# EAGLE board SteppyMk2_10x10 (EAGLE 9.2.2)
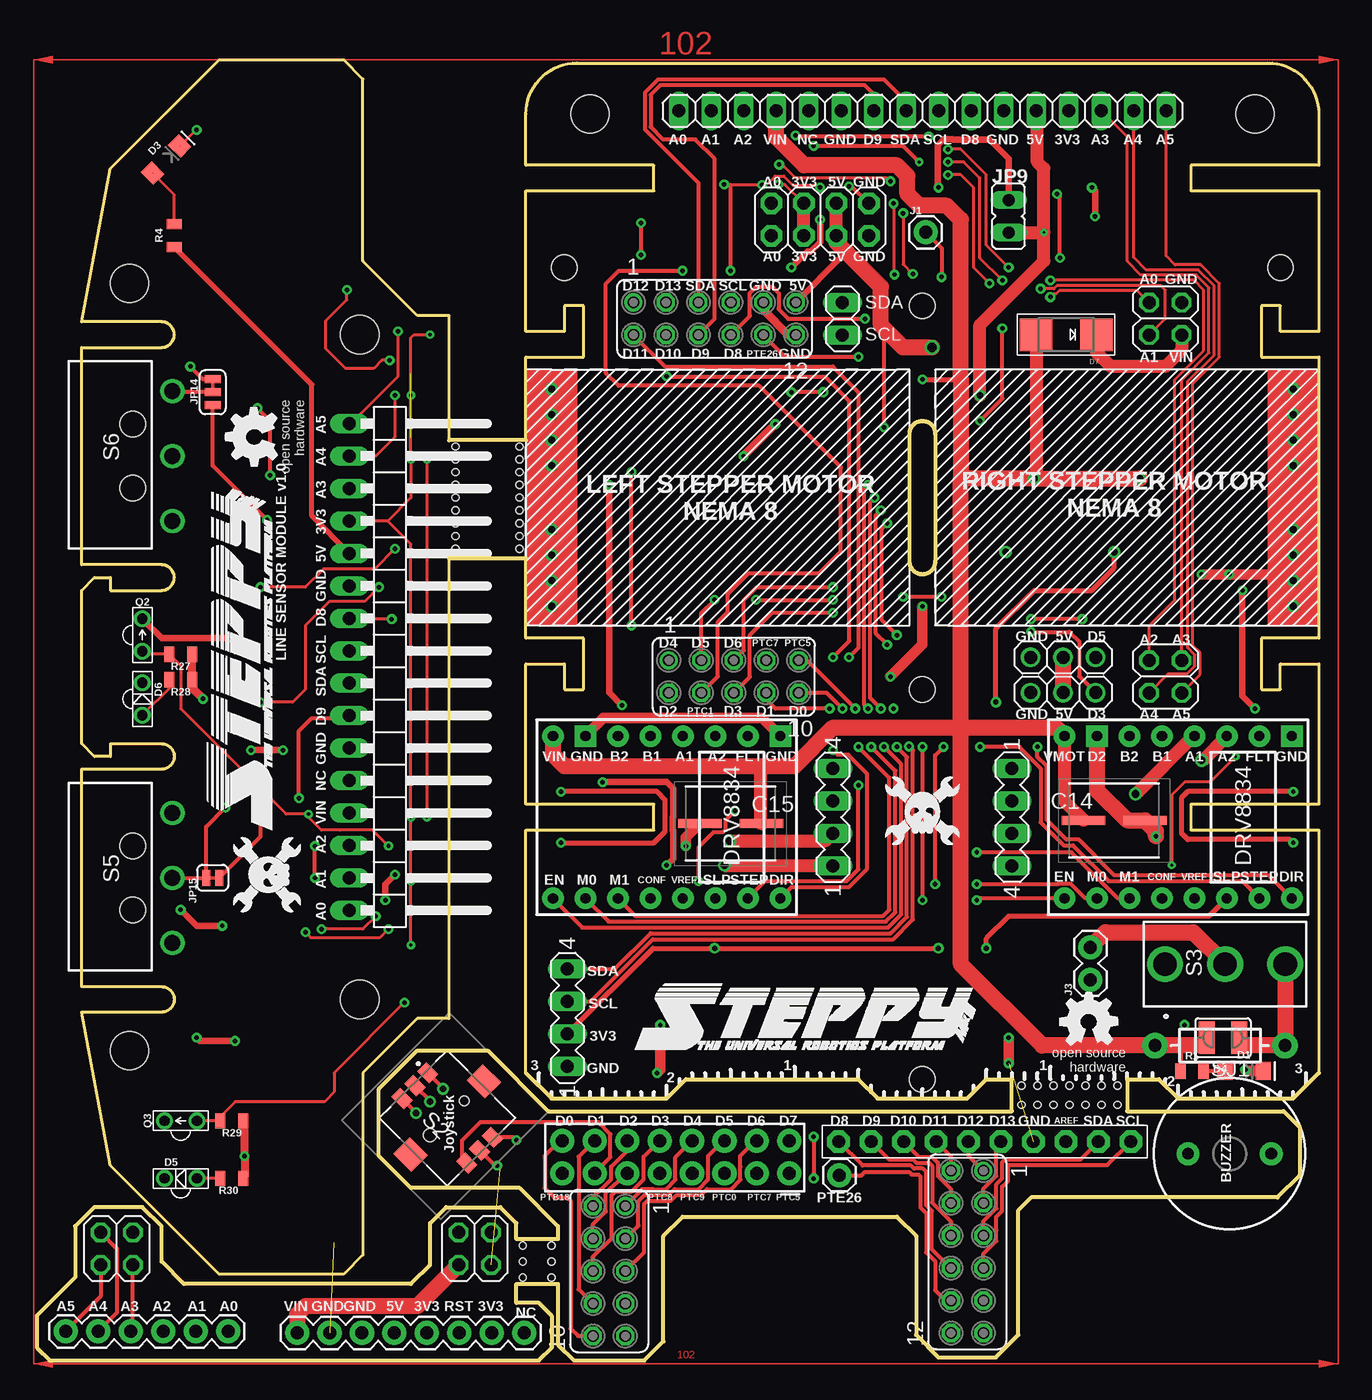
[diagram p0: board, top side]
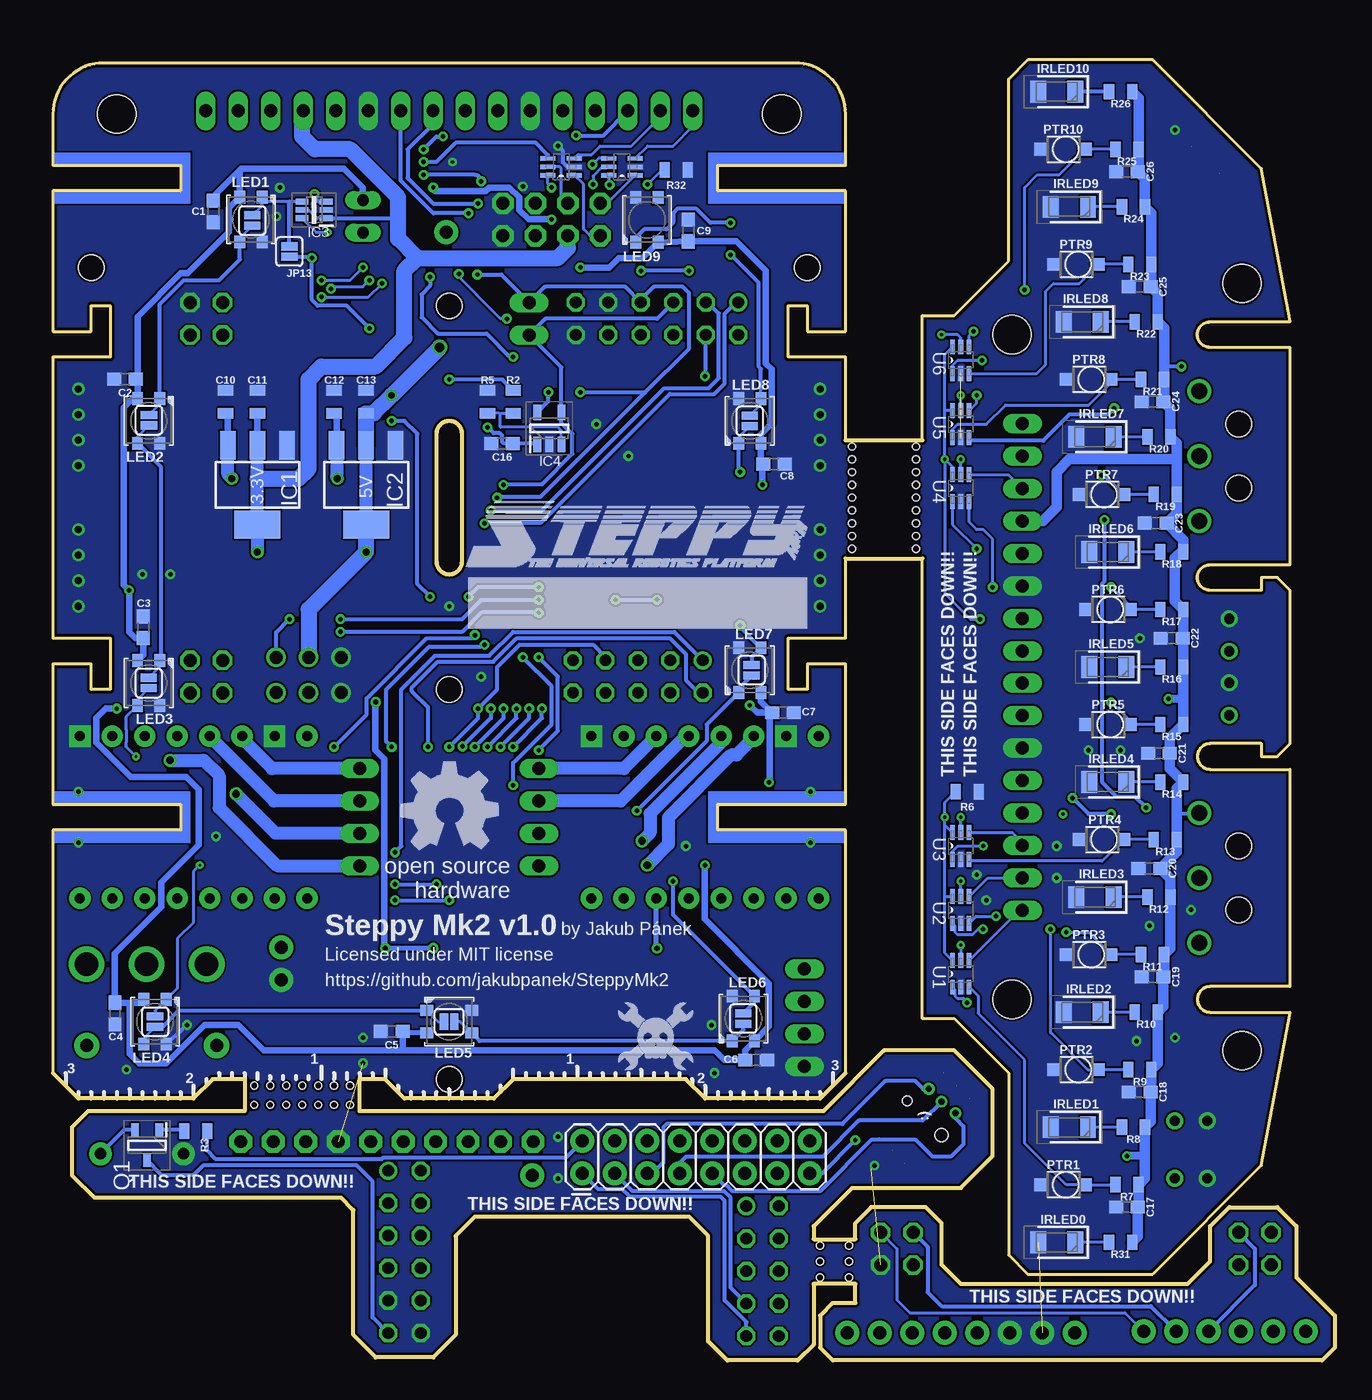
[diagram p1: board, bottom side, seen from below]

Size 100.25 x 101.75 mm. Coordinates in mm from the lower left corner, seen from the top.
Outline: 38.25,97.5 arc-90 42.25,101.5
Outline: 96.25,101.5 arc-90 100.25,97.5
Outline: 38.25,97.5 38.25,93.5 48.25,93.5 48.25,91.5 38.25,91.5 38.25,80.5 41.25,80.5 41.25,82.5 42.75,82.5 42.75,78.5 38.25,78.5 38.25,72 32.25,72 32.25,81.75 29.75,81.75 25.5,86 25.5,100.25 24,101.75 14.25,101.75 5.75,93.25 3.5,81.25 9.75,81.25 arc-90 10.75,80.25 arc-90 9.75,79.25 3.5,79.25 3.5,62.25 9.75,62.25 arc-90 10.75,61.25 arc-90 9.75,60.25 5.75,60.25 5.75,61.25 4.5,61.25 3.5,60.25 3.5,48.25 4.5,47.25 5.75,47.25 5.75,48.25 9.75,48.25 arc-90 10.75,47.25 arc-90 9.75,46.25 3.5,46.25 3.5,29.25 9.75,29.25 arc-90 10.75,28.25 arc-90 9.75,27.25 3.5,27.25 5.75,15.25 14.25,6.75 24,6.75 25.5,8.25 25.5,22.5 29.75,26.75 32.25,26.75 32.25,62.75 38.25,62.75 38.25,56.5 42.75,56.5 42.75,52.5 41.25,52.5 41.25,54.5 38.25,54.5 38.25,43.5 48.25,43.5 48.25,41.5 38.25,41.5 38.25,22.5 40.25,20.5 49.25,20.5 50.75,22 64.25,22 65.75,20.5 72.75,20.5 74.25,22 76.25,22 76.25,19.5 40,19.5 35.26,24.25 29.75,24.25 26.75,21.25 26.75,16 29.25,13.5 37.75,13.5 40.75,10.5 40.75,9.5 37.5,9.5 37.5,10.75 36.25,12 32,12 30.75,10.75 30.75,7.5 29.25,6 11.5,6 9.75,7.75 9.75,10.5 8.25,12 4.5,12 3,10.5 3,6.5 0,3.5 0,1 1,0 39.25,0 40.25,1 40.25,3.5 39.25,4.5 37.5,4.5 37.5,6 40.75,6 40.75,1.25 42,0 47.5,0 49,1.5 49,9.75 50.5,11.25 67.25,11.25 68.75,9.75 68.75,2 70.5,0.25 75,0.25 76.75,2 76.75,11.75 77.75,12.75 97,12.75 98.75,14.5 98.75,18.26 97.5,19.5 85.25,19.5 85.25,22 87.75,22 89.25,20.5 98.25,20.5 100.25,22.5 100.25,41.5 90.25,41.5 90.25,43.5 100.25,43.5 100.25,54.5 97.25,54.5 97.25,52.5 95.75,52.5 95.75,56.5 100.25,56.5 100.25,78.5 95.75,78.5 95.75,82.5 97.25,82.5 97.25,80.5 100.25,80.5 100.25,91.5 90.25,91.5 90.25,93.5 100.25,93.5 100.25,97.5
Outline: 38.25,97.5 arc-90 42.25,101.5
Outline: 42.25,101.5 96.25,101.5
Outline: 96.25,101.5 arc-90 100.25,97.5
Outline: 68.25,62.5 68.25,72.5 arc-90 69.25,73.5 arc-90 70.25,72.5 70.25,62.5 arc-90 69.25,61.5 arc-90 68.25,62.5
Copper layers (1*16): Top 0.035mm / dielectric 1.5mm / Bottom 0.035mm
Design rules "default *": minimum track width 6mil, minimum drill 0.2mm, track to track 6mil, track to pad 6mil, pad to pad 6mil, via to via 6mil, smd to smd 6mil, copper to edge 0.2mm, drill to drill 6mil, minimum pad ring 10mil, minimum via ring 8mil, stop-mask expansion 4mil, vias tented up to drill 0mil, thermal gap 10mil
Holes 2 mm at 41.25,85.5 69.25,52.5 69.25,82.5 7.5,68.25 7.5,73.25 7.5,35.25 7.5,40.25 69.25,22 97.25,85.5
Holes 3 mm at 95.25,97.5 43.25,97.5 25.25,28.25 25.25,80.25 7.25,24.25 7.25,84.25
Holes 0.55 mm at 32.75,69.5 32.75,68.5 32.75,67.5 32.75,66.5 32.75,65.5 37.75,65.5 37.75,66.5 37.75,67.5 37.75,68.5 37.75,69.5 38,6.5 38,9 38,7.75 40.25,9 40.25,6.5 40.25,7.75 77,20 78.25,20 79.5,20 80.75,20 82,20 82,21.5 77,21.5 78.25,21.5 80.75,21.5 79.5,21.5 83.25,20 84.5,20 83.25,21.5 84.5,21.5 37.75,64.5 37.75,63.5 32.75,63.5 32.75,64.5 32.75,70.5 32.75,71.5 37.75,71.5 37.75,70.5

## Footprints (pad centres in the part's own frame; a part is rotated, then mirrored left to right if it is on the bottom)
0603 = smd 1.1 x 1: 1 -0.85,0; 2 0.85,0
0805 = smd 0.8 x 1.2: 1 -0.9,0; 2 0.9,0
CAPM7058X610N = smd 3.4 x 0.7: 1 -2.4,0; 2 2.4,0
POLOLU-DRV8825 = drill 0.8 pad 1.676: A1 6.35,-1.27; A2 6.35,-3.81; B1 6.35,1.27; B2 6.35,3.81; CONFIG -6.35,1.27; DIR -6.35,-8.89; EN -6.35,8.89; FLT 6.35,-6.35; M0 -6.35,6.35; M1 -6.35,3.81; SLP -6.35,-3.81; STEP -6.35,-6.35; VMOT 6.35,8.89; VREF -6.35,-1.27 | drill 0.8 pad 1.676 square: GND0 6.35,6.35; GND1 6.35,-8.89
LED-1206 = smd 1.2 x 1.4: A -1.5,0; C 1.5,0
DIODE-1N4001 = drill 1 pad 1.981: A -5.08,0; C 5.08,0
LTE-302 = drill 0.8: A 1.27,0; C -1.27,0
SMADIODE = smd 2.54 x 2.54: A 2.349,0; C -2.349,0
SOT223 = smd 1.219 x 2.235: 1 -2.311,-3.099; 2 0,-3.099; 3 2.311,-3.099 | smd 3.6 x 2.2: TAB 0,3.099
SOT65P210X110-6N = smd 1 x 0.45: 1 -0.95,0.65; 2 -0.95,0; 3 -0.95,-0.65; 4 0.95,-0.65; 5 0.95,0; 6 0.95,0.65
SOT95P280X145-5N = smd 1.2 x 0.6: 1 -1.25,0.95; 2 -1.25,0; 3 -1.25,-0.95; 4 1.25,-0.95; 5 1.25,0.95
LEDC3215X130N = smd 1.25 x 1.7: 1 -1.45,0; 2 1.45,0
1X01 = drill 1.016 pad 1.88: 1 0,0
1X02 = drill 1.016 pad 1.88: 1 0,0; 2 2.54,0
1X08 = drill 1.016 pad 1.88: 1 0,0; 2 2.54,0; 3 5.08,0; 4 7.62,0; 5 10.16,0; 6 12.7,0; 7 15.24,0; 8 17.78,0
1X06 = drill 1.016 pad 1.88: 1 0,0; 2 2.54,0; 3 5.08,0; 4 7.62,0; 5 10.16,0; 6 12.7,0
2X8 = drill 1.016 pad 1.88: 1 0,0; 2 0,2.54; 3 2.54,0; 4 2.54,2.54; 5 5.08,0; 6 5.08,2.54; 7 7.62,0; 8 7.62,2.54; 9 10.16,0; 10 10.16,2.54; 11 12.7,0; 12 12.7,2.54; 13 15.24,0; 14 15.24,2.54; 15 17.78,0; 16 17.78,2.54
SMT-JUMPER_2_NC_PASTE_SILK = smd 0.635 x 1.27: 1 -0.406,0; 2 0.406,0
JP1 = drill 0.914 long: 1 0,-1.27; 2 0,1.27
1X16/90 = drill 1.016 long: 1 -19.05,-3.81; 2 -16.51,-3.81; 3 -13.97,-3.81; 4 -11.43,-3.81; 5 -8.89,-3.81; 6 -6.35,-3.81; 7 -3.81,-3.81; 8 -1.27,-3.81; 9 1.27,-3.81; 10 3.81,-3.81; 11 6.35,-3.81; 12 8.89,-3.81; 13 11.43,-3.81; 14 13.97,-3.81; 15 16.51,-3.81; 16 19.05,-3.81
1X16 = drill 1.016 long: 1 -19.05,0; 2 -16.51,0; 3 -13.97,0; 4 -11.43,0; 5 -8.89,0; 6 -6.35,0; 7 -3.81,0; 8 -1.27,0; 9 1.27,0; 10 3.81,0; 11 6.35,0; 12 8.89,0; 13 11.43,0; 14 13.97,0; 15 16.51,0; 16 19.05,0
2X04 = drill 1.016 pad 1.676 octagon: 1 -3.81,-1.27; 2 -3.81,1.27; 3 -1.27,-1.27; 4 -1.27,1.27; 5 1.27,-1.27; 6 1.27,1.27; 7 3.81,-1.27; 8 3.81,1.27
SMT-JUMPER_3_1-NC_TRACE_SILK = smd 0.635 x 1.27: 1 -1.016,0; 2 0,0; 3 1.016,0
SMT-JUMPER_2_NC_TRACE_SILK = smd 0.635 x 1.27: 1 -0.508,0; 2 0.508,0
2X02 = drill 1.016 octagon: 1 -1.27,-1.27; 2 -1.27,1.27; 3 1.27,-1.27; 4 1.27,1.27
1X03 = drill 1.016: 1 -2.54,0; 2 0,0; 3 2.54,0
1X02' = drill 1.016 long: 1 -1.27,0; 2 1.27,0
LED3535 = smd 1 x 0.85: 1 -1.75,0.875; 2 -1.75,-0.875; 3 1.75,-0.875; 4 1.75,0.875
BUZZER-12MM = drill 0.9 pad 1.778: + 3.25,0; - -3.25,0
TEMT1020 = smd 1.1 x 1: 1 -1.7,0; 2 1.7,0
SOT96P237X111-3N = smd 1 x 0.6: 1 -1.2,0.955; 2 -1.2,-0.955; 3 1.2,0
LTR-301 = drill 0.8: C 1.27,0; E -1.27,0
SKRHABE010 = smd 1.35 x 1: 1 -3.575,1.425; 2 -3.575,0; 3 -3.575,-1.425; 4 3.575,1.425; 5 3.575,0; 6 3.575,-1.425 | smd 2 x 1.8: 7 0,4.05; 8 0,-4.05 | hole 0.75: 0,1.9 | hole 1.05: 0,-1.9
5MS1S102AM2QES = drill 1.85 pad 2.8: 1 0,-4.7; 2 0,0; 3 0,4.7
AH186061A = drill 1.25 pad 1.9: 1 -5.08,1.6; 2 0,1.6; 3 5.08,1.6
SJW = smd 1.27 x 2.54: 1 -1.27,0; 2 1.27,0
MA04-1 = drill 1.016 long: 1 -3.81,0; 2 -1.27,0; 3 1.27,0; 4 3.81,0
FE05-2 = drill 0.914: 1 -5.08,1.27 | drill 0.914 octagon: 2 -5.08,-1.27; 3 -2.54,1.27; 4 -2.54,-1.27; 5 0,1.27; 6 0,-1.27; 7 2.54,1.27; 8 2.54,-1.27; 9 5.08,1.27; 10 5.08,-1.27
FE06-2 = drill 0.914: 1 -6.35,1.27 | drill 0.914 octagon: 2 -6.35,-1.27; 3 -3.81,1.27; 4 -3.81,-1.27; 5 -1.27,1.27; 6 -1.27,-1.27; 7 1.27,1.27; 8 1.27,-1.27; 9 3.81,1.27; 10 3.81,-1.27; 11 6.35,1.27; 12 6.35,-1.27
SOT65P210X110-6N' = smd 1.168 x 0.356: 1 -1.041,0.66; 2 -1.041,0; 3 -1.041,-0.66; 4 1.041,-0.66; 5 1.041,0; 6 1.041,0.66
1X10-BIG = drill 1.016 pad 1.778 octagon: 1 -11.43,0; 2 -8.89,0; 3 -6.35,0; 4 -3.81,0; 5 -1.27,0; 6 1.27,0; 7 3.81,0; 8 6.35,0; 9 8.89,0; 10 11.43,0

## Placement (x,y rotation side)
C1  0.1uF  [0603]  87.71,89.89 270 bottom
C2  0.1uF  [0603]  94.61,76.77 180 bottom
C3  0.1uF  [0603]  93.17,57.36 90 bottom
C4  0.1uF  [0603]  95.39,27.14 270 bottom
C5  0.1uF  [0603]  73.75,25.75 180 bottom
C6  0.1uF  [0603]  45.25,23.5 0 bottom
C7  0.1uF  [0603]  43.14,50.68 0 bottom
C8  0.1uF  [0603]  43.86,70.13 0 bottom
C9  0.1uF  [0603]  50.56,88.39 90 bottom
C10  10uF  [0805]  86.75,75 90 bottom
C11  10uF  [0805]  84.25,75 90 bottom
C12  10uF  [0805]  78.25,75 90 bottom
C13  10uF  [0805]  75.75,75 90 bottom
C14  100UF  [CAPM7058X610N]  84.25,42.25 180 top
C15  100UF  [CAPM7058X610N]  54.25,42 0 top
C16  0.1uF  [0603]  65.13,71.73 180 bottom
C17  0.1uF  [0603]  16.25,12 0 bottom
C18  0.1uF  [0603]  15.25,21 0 bottom
C19  0.1uF  [0603]  14.25,30 0 bottom
C20  0.1uF  [0603]  14.5,38.5 0 bottom
C21  0.1uF  [0603]  13.75,47.5 0 bottom
C22  0.1uF  [0603]  12.75,56.5 0 bottom
C23  0.1uF  [0603]  14,65.5 0 bottom
C24  0.1uF  [0603]  14.25,75 0 bottom
C25  0.1uF  [0603]  15.25,84 0 bottom
C26  0.1uF  [0603]  16.25,93 0 bottom
CONLEFT  POLOLU-DRV8825  [POLOLU-DRV8825]  89.25,42.5 90 top
D1  GREEN  [LED-1206]  94.4,22.65 0 top
D3  GREEN  [LED-1206]  10.11,93.95 45 top
D4  P2000A  [DIODE-1N4001]  92.52,24.64 180 top
D5  [LTE-302]  11.25,14.25 0 top
D6  [LTE-302]  8.25,51.75 270 top
D7  [SMADIODE]  80.5,80.25 180 top
GOLD_ORB_SM1  OSHWLOGOLOGO8MM  [OSHW_8MM]  69.25,43 0 bottom
GOLD_ORB_SM2  OSHWLOGOLOGO5MM  [OSHW_5MM]  82.25,26.5 0 top
GOLD_ORB_SM3  OSHWLOGOLOGO5MM  [OSHW_5MM]  17,72.25 90 top
IC1  AP1117E33G-13  [SOT223]  84.25,68.5 180 bottom
IC2  TS1117BCW-5.0  [SOT223]  75.75,68.5 180 bottom
IC3  74LVC1T45GW,125  [SOT65P210X110-6N]  79.82,90.01 180 bottom
IC4  MCP3021A0T-E_OT  [SOT95P280X145-5N]  61.42,72.92 90 bottom
IRLED0  LL-S150IRC-2A  [LEDC3215X130N]  21.75,9.25 180 bottom
IRLED1  LL-S150IRC-2A  [LEDC3215X130N]  20.75,18.25 180 bottom
IRLED2  LL-S150IRC-2A  [LEDC3215X130N]  19.75,27.25 180 bottom
IRLED3  LL-S150IRC-2A  [LEDC3215X130N]  18.75,36.25 180 bottom
IRLED4  LL-S150IRC-2A  [LEDC3215X130N]  17.75,45.25 180 bottom
IRLED5  LL-S150IRC-2A  [LEDC3215X130N]  17.75,54.25 180 bottom
IRLED6  LL-S150IRC-2A  [LEDC3215X130N]  17.75,63.25 180 bottom
IRLED7  LL-S150IRC-2A  [LEDC3215X130N]  18.75,72.25 180 bottom
IRLED8  LL-S150IRC-2A  [LEDC3215X130N]  19.75,81.25 180 bottom
IRLED9  LL-S150IRC-2A  [LEDC3215X130N]  20.75,90.25 180 bottom
IRLED10  LL-S150IRC-2A  [LEDC3215X130N]  21.75,99.25 180 bottom
J1  [1X01]  69.5,88.25 0 top
J3  [1X02]  82.38,29.79 90 top
J5  [1X08]  38.13,2.16 180 top
J6  [1X06]  14.96,2.28 180 top
J7  [1X01]  62.75,14.5 270 top
J8  [2X8]  58.85,14.65 0 bottom
JP1  JUMPER-SMT_2_NC_PASTE_SILK  [SMT-JUMPER_2_NC_PASTE_SILK]  84.65,89.18 270 bottom
JP2  JUMPER-SMT_2_NC_PASTE_SILK  [SMT-JUMPER_2_NC_PASTE_SILK]  92.73,73.56 270 bottom
JP3  JUMPER-SMT_2_NC_PASTE_SILK  [SMT-JUMPER_2_NC_PASTE_SILK]  92.75,53 270 bottom
JP4  JUMPER-SMT_2_NC_PASTE_SILK  [SMT-JUMPER_2_NC_PASTE_SILK]  92.25,26.5 270 bottom
JP5  JUMPER-SMT_2_NC_PASTE_SILK  [SMT-JUMPER_2_NC_PASTE_SILK]  69.25,26.5 0 bottom
JP6  JUMPER-SMT_2_NC_PASTE_SILK  [SMT-JUMPER_2_NC_PASTE_SILK]  46.25,26.75 90 bottom
JP7  JUMPER-SMT_2_NC_PASTE_SILK  [SMT-JUMPER_2_NC_PASTE_SILK]  45.61,54 90 bottom
JP8  JUMPER-SMT_2_NC_PASTE_SILK  [SMT-JUMPER_2_NC_PASTE_SILK]  45.75,73.5 90 bottom
JP9  [JP1]  76,89.5 180 top
JP10  [1X16/90]  28.25,54.25 270 top
JP11  [1X16]  69.25,97.75 0 top
JP12  [2X04]  61.25,89.25 0 top
JP13  JUMPER-SMT_2_NC_PASTE_SILK  [SMT-JUMPER_2_NC_PASTE_SILK]  81.75,86.75 90 bottom
JP14  JUMPER-SMT_3_1-NC_TRACE_SILK  [SMT-JUMPER_3_1-NC_TRACE_SILK]  13.75,75.75 90 top
JP15  JUMPER-SMT_2_NC_TRACE_SILK  [SMT-JUMPER_2_NC_TRACE_SILK]  13.75,37.75 180 top
JP21  [2X02]  34.25,8.75 180 top
JP22  [2X02]  6.25,8.75 180 top
JP23  [2X02]  88.25,81.5 270 top
JP24  [1X03]  80.25,55 0 top
JP25  [1X03]  80.25,52.25 0 top
JP26  [2X02]  88.25,53.5 270 top
JP27  [1X02']  63,81.5 90 top
LED1  WS2812B3535  [LED3535]  84.75,89.25 270 bottom
LED2  WS2812B3535  [LED3535]  92.75,73.5 270 bottom
LED3  WS2812B3535  [LED3535]  92.75,53 270 bottom
LED4  WS2812B3535  [LED3535]  92.25,26.5 270 bottom
LED5  WS2812B3535  [LED3535]  69.25,26.5 0 bottom
LED6  WS2812B3535  [LED3535]  46.25,26.75 90 bottom
LED7  WS2812B3535  [LED3535]  45.75,54 90 bottom
LED8  WS2812B3535  [LED3535]  45.75,73.5 90 bottom
LED9  WS2812B3535  [LED3535]  53.79,89.23 90 bottom
LS1  BUZZER-PTH  [BUZZER-12MM]  93.28,16.17 0 top
PTR1  TEMT1020  [TEMT1020]  21.25,13.75 180 bottom
PTR2  TEMT1020  [TEMT1020]  20.25,22.75 180 bottom
PTR3  TEMT1020  [TEMT1020]  19.25,31.75 180 bottom
PTR4  TEMT1020  [TEMT1020]  18.25,40.75 180 bottom
PTR5  TEMT1020  [TEMT1020]  17.75,49.75 180 bottom
PTR6  TEMT1020  [TEMT1020]  17.75,58.75 180 bottom
PTR7  TEMT1020  [TEMT1020]  18.25,67.75 180 bottom
PTR8  TEMT1020  [TEMT1020]  19.25,76.75 180 bottom
PTR9  TEMT1020  [TEMT1020]  20.25,85.75 180 bottom
PTR10  TEMT1020  [TEMT1020]  21.25,94.75 180 bottom
Q1  SBC817-40LT1G  [SOT96P237X111-3N]  92.88,16.85 270 bottom
Q2  [LTR-301]  8.25,56.75 270 top
Q3  [LTR-301]  11.25,18.75 0 top
R1  1K  [0805]  90.34,22.64 0 top
R2  10K  [0805]  64.25,75 270 bottom
R3  4.7K  [0805]  89.08,17.94 0 bottom
R4  330  [0805]  10.75,88 90 top
R5  10K  [0805]  66.25,75 90 bottom
R6  330K  [0805]  28.75,44.5 180 bottom
R7  10K  [0805]  16.25,13.75 180 bottom
R8  330  [0805]  15.75,18.25 180 bottom
R9  10K  [0805]  15.25,22.75 180 bottom
R10  330  [0805]  14.75,27.25 180 bottom
R11  10K  [0805]  14.25,31.75 180 bottom
R12  330  [0805]  13.75,36.25 180 bottom
R13  10K  [0805]  13.25,40.75 180 bottom
R14  330  [0805]  12.75,45.25 180 bottom
R15  10K  [0805]  12.75,49.75 180 bottom
R16  330  [0805]  12.75,54.25 180 bottom
R17  10K  [0805]  12.75,58.75 180 bottom
R18  330  [0805]  12.75,63.25 180 bottom
R19  10K  [0805]  13.25,67.75 180 bottom
R20  330  [0805]  13.75,72.25 180 bottom
R21  10K  [0805]  14.25,76.75 180 bottom
R22  330  [0805]  14.75,81.25 180 bottom
R23  10K  [0805]  15.25,85.75 180 bottom
R24  330  [0805]  15.75,90.25 180 bottom
R25  10K  [0805]  16.25,94.75 180 bottom
R26  330  [0805]  16.75,99.25 180 bottom
R27  10K  [0805]  11.25,55.25 180 top
R28  330  [0805]  11.25,53.25 180 top
R29  10K  [0805]  15.25,18.75 180 top
R30  330  [0805]  15.25,14.25 180 top
R31  330  [0805]  16.75,9.25 180 bottom
R32  330K  [0805]  51.5,93.12 180 bottom
S2  SKRHABE010  [SKRHABE010]  32.09,18.97 315 top
S3  5MS1S102AM2QES  [5MS1S102AM2QES]  92.92,31.01 270 top
S5  AH186061A  [AH186061A]  9,37.75 270 top
S6  AH186061A  [AH186061A]  9,70.75 270 top
SJ1  [SJW]  92.75,25.25 180 top
SV1  [MA04-1]  62.25,42.5 90 top
SV2  [MA04-1]  76.25,42.5 270 top
SV3  [MA04-1]  41.48,26.81 90 top
SV4  [FE05-2]  44.75,7 270 top
SV5  [FE06-2]  72.75,8.5 270 top
SV6  [FE05-2]  54.5,53.5 0 top
SV7  [FE06-2]  53,81.5 0 top
U1  NC7SB3157P6X  [SOT65P210X110-6N']  29.25,30.25 90 bottom
U2  NC7SB3157P6X  [SOT65P210X110-6N']  29.25,35.25 90 bottom
U3  NC7SB3157P6X  [SOT65P210X110-6N']  29.25,40.25 90 bottom
U4  NC7SB3157P6X  [SOT65P210X110-6N']  29.25,68.25 90 bottom
U5  NC7SB3157P6X  [SOT65P210X110-6N']  29.25,73.25 90 bottom
U6  NC7SB3157P6X  [SOT65P210X110-6N']  29.25,78.25 90 bottom
U7  NC7SB3157P6X  [SOT65P210X110-6N']  55.75,93.38 180 bottom
U8  NC7SB3157P6X  [SOT65P210X110-6N']  60.5,93.38 180 bottom
U$1  PINHD-1X10  [1X10-BIG]  74.12,17.12 0 top
U$2  POLOLU-DRV8825  [POLOLU-DRV8825]  49.25,42.5 90 top

## Library data of the parts
C1-C9 C16-C26 = SparkFun-Capacitors; PROD_ID: CAP-08604
C10-C13 = SparkFun-Capacitors; PROD_ID: CAP-11330
C14 C15 = EEEFK1C101P; ALLIED_NUMBER: 70256494; ALLIED_PRICE-STOCK: https://www.alliedelec.com/panasonic-eee-fk1c101p/70256494/; DESCRIPTION: Ecap 100uF 16V D case Panasonic 100uF 16 V dc Aluminium Electrolytic Capacitor, FK SMD Series 2000h 6.3 Dia. x 5.8mm; HEIGHT: 6.1mm; MANUFACTURER_NAME: Panasonic; MANUFACTURER_PART_NUMBER: EEEFK1C101P; RS_PART_NUMBER: 5370433P; RS_PRICE-STOCK: http://uk.rs-online.com/web/p/products/5370433P
CONLEFT U$2 = alvarop-lib
D1 D3 = SparkFun-LED; PROD_ID: DIO-00862
D4 = SparkFun-DiscreteSemi; PROD_ID: DIO-09176
D5 D6 = SparkFun-LED; PROD_ID: DIO-14163; SF_ID: SEN-00241
D7 JP12 JP24 JP25 LED1-LED9 U$1 = adafruit
GOLD_ORB_SM1-GOLD_ORB_SM3 = oshw
IC1 IC2 = lm1117
IC3 = 74LVC1T45GW_125; DESCRIPTION: NXP - 74LVC1T45GW,125 - TRANSCEIVER, 3 STATE, SOT-363-6; HEIGHT: 1.1mm; MANUFACTURER_NAME: Nexperia; MANUFACTURER_PART_NUMBER: 74LVC1T45GW,125; MOUSER_PART_NUMBER: 771-74LVC1T45GW125; MOUSER_PRICE-STOCK: https://www.mouser.com/Search/Refine.aspx?Keyword=771-74LVC1T45GW125; RS_PART_NUMBER: 8168791P; RS_PRICE-STOCK: http://befr.rs-online.com/web/p/products/8168791P
IC4 = MCP3021A0T-E_OT; ALLIED_NUMBER: 70451980; ALLIED_PRICE-STOCK: https://www.alliedelec.com/microchip-technology-inc-mcp3021a0t-e-ot/70451980/; DESCRIPTION: MICROCHIP - MCP3021A0T-E/OT - ADC, AEC-Q100, SAR, 10BIT, SOT-23-5; HEIGHT: 1.45mm; MANUFACTURER_NAME: Microchip; MANUFACTURER_PART_NUMBER: MCP3021A0T-E/OT; MOUSER_PART_NUMBER: 579-MCP3021A0T-E/OT; MOUSER_PRICE-STOCK: https://www.mouser.com/Search/Refine.aspx?Keyword=579-MCP3021A0T-E%2FOT
IRLED0 IRLED1-IRLED10 = PT15-21C_TR8; DESCRIPTION: Phototransistors IR Phototransistor; HEIGHT: 1.3mm; MANUFACTURER_NAME: Everlight; MANUFACTURER_PART_NUMBER: PT15-21C/TR8; MOUSER_PART_NUMBER: 638-PT1521CTR8; MOUSER_PRICE-STOCK: https://www.mouser.com/Search/Refine.aspx?Keyword=638-PT1521CTR8
J1 J3 J7 J8 = SparkFun-Connectors
J5 = SparkFun-Connectors; PROD_ID: CONN-08438
J6 = SparkFun-Connectors; PROD_ID: CONN-08437
JP1-JP8 JP13-JP15 = SparkFun-Jumpers
JP9 SJ1 = jumper
JP10 JP11 JP21-JP23 JP26 JP27 = pinhead
LS1 = SparkFun-Electromechanical; PROD_ID: COMP-08253; SF_SKU: COM-07950
PTR1-PTR10 = TEMD1020; DESCRIPTION: VISHAY - TEMD1020 - PHOTODIODE, 940NM, 15DEG, SMD; HEIGHT: mm; MANUFACTURER_NAME: Vishay; MANUFACTURER_PART_NUMBER: TEMD1020; MOUSER_PART_NUMBER: 782-TEMD1020; MOUSER_PRICE-STOCK: https://www.mouser.com/Search/Refine.aspx?Keyword=782-TEMD1020; RS_PART_NUMBER: 1808105P; RS_PRICE-STOCK: http://uk.rs-online.com/web/p/products/1808105P
Q1 = SBC817-40LT1G; ALLIED_NUMBER: 70300549; ALLIED_PRICE-STOCK: http://www.alliedelec.com/on-semiconductor-sbc817-40lt1g/70300549/; DESCRIPTION: NPN Bipolar Transistor, 500 mA 45 V, 3-pin SOT-23; HEIGHT: 1.11mm; MANUFACTURER_NAME: ON Semiconductor; MANUFACTURER_PART_NUMBER: SBC817-40LT1G; MOUSER_PART_NUMBER: 863-SBC817-40LT1G; MOUSER_PRICE-STOCK: https://www.mouser.com/Search/Refine.aspx?Keyword=863-SBC817-40LT1G; RS_PART_NUMBER: 1631159; RS_PRICE-STOCK: http://uk.rs-online.com/web/p/products/1631159
Q2 Q3 = SparkFun-Sensors; PROD_ID: DIO-10904; SF_ID: SEN-00241
R1-R32 = SparkFun-Resistors
S2 = SKRHABE010; DESCRIPTION: Multi-Directional Switches 4-directn cntr push W/boss 200K Cycles; HEIGHT: 5mm; MANUFACTURER_NAME: ALPS; MANUFACTURER_PART_NUMBER: SKRHABE010; MOUSER_PART_NUMBER: 688-SKRHAB; MOUSER_PRICE-STOCK: https://www.mouser.com/Search/Refine.aspx?Keyword=688-SKRHAB
S3 = 5MS1S102AM2QES; DESCRIPTION: Slide switch,SP,5.08 high PC thru-hole PCB Slide Switch SPDT On-On 5 A@ 28 V dc Top; HEIGHT: mm; MANUFACTURER_NAME: RS Components; MANUFACTURER_PART_NUMBER: 5MS1S102AM2QES; RS_PART_NUMBER: 7347292; RS_PRICE-STOCK: http://uk.rs-online.com/web/p/products/7347292
S5 S6 = AH186061A; DESCRIPTION: Ultra-miniature Size Switch; HEIGHT: mm; MANUFACTURER_NAME: Panasonic; MANUFACTURER_PART_NUMBER: AH186061A
SV1-SV3 = con-lstb; OC_FARNELL: unknown; OC_NEWARK: unknown
SV4-SV7 = con-lsta; OC_FARNELL: unknown; OC_NEWARK: unknown
U1-U8 = NC7SB3157P6X; AVAILABILITY: Unavailable; DESCRIPTION: NC7SB3157 Series 1.65 to 5.5 V Multiplexer/Demultiplexer Bus Switch - SC-70-6; MF: ON Semiconductor; MP: NC7SB3157P6X; PACKAGE: SC-70-6 ON Semiconductor; PRICE: None

## Nets
3V3REG: C11.1 CONLEFT.SLP IC1.2 IC1.TAB IC3.1 IC3.5 JP11.13 JP12.3 JP12.4 SV3.2 U7.5 U8.5 U$2.SLP
3V3REG_: C17.2 C18.2 C19.2 C20.2 C21.2 C22.2 C23.2 C24.2 C25.2 C26.2 JP10.4 JP14.3 R7.1 R8.1 R9.1 R10.1 R11.1 R12.1 R13.1 R14.1 R15.1 R16.1 R17.1 R18.1 R19.1 R20.1 R21.1 R22.1 R23.1 R24.1 R25.1 R26.1 R27.1 R28.1 R29.1 R30.1 R31.1 S5.1 U1.5 U2.5 U3.5 U4.5 U5.5 U6.5
5VREG: C13.1 C16.1 IC2.2 IC2.TAB IC3.6 IC4.1 JP9.2 JP11.12 JP12.5 JP12.6 JP24.2 JP25.2 SV7.11
5VREG*: Q1.3 SV5.11
5VREG_: JP10.5 R4.1
A0: JP23.1 U7.4
A0*: J6.1 JP21.1
A0A: PTR1.1 R7.2 U1.3
A0B: Q3.C R29.2 U1.1
A0C: JP11.1 U7.3
A0D: JP12.2 U7.1
A0S: JP10.16 U1.4
A1: JP23.3 U8.4
A1*: J6.2 JP21.3
A1A: PTR2.1 R9.2 U2.3
A1B: PTR3.1 R11.2 U2.1
A1C: JP11.2 U8.3
A1D: JP12.1 U8.1
A1S: JP10.15 U2.4
A2: JP11.3 JP26.1
A2*: J6.3 JP22.1
A2A: PTR4.1 R13.2 U3.3
A2B: Q2.C R27.2 U3.1
A2S: JP10.14 U3.4
A3: JP11.14 JP26.2
A3*: J6.4 JP22.2
A3A: PTR5.1 R15.2 U4.3
A3B: PTR6.1 R17.2 U4.1
A3S: JP10.3 U4.4
A4: JP11.15 JP26.3
A4*: J6.5 JP22.3
A4A: PTR7.1 R19.2 U5.3
A4B: PTR8.1 R21.2 U5.1
A4S: JP10.2 U5.4
A5: JP11.16 JP26.4
A5*: J6.6 JP22.4
A5A: PTR9.1 R23.2 U6.3
A5B: PTR10.1 R25.2 U6.1
A5S: JP10.1 U6.4
D0: SV6.10 U$2.M0
D0*: J8.16 SV4.10
D1: SV6.8 U$2.M1
D1*: J8.14 SV4.8
D2: CONLEFT.M0 SV6.2
D2*: J8.12 SV4.2
D3: JP25.3 SV6.6
D3*: J8.10 SV4.6
D4: CONLEFT.M1 SV6.1
D4*: J8.8 SV4.1
D5: JP24.3 SV6.3
D5*: J8.6 SV4.3
D6: IC3.3 JP13.1 SV6.5
D6*: J8.4 SV4.5
D7*: J8.2 R3.2
D8: JP11.10 SV7.8
D8*: SV5.8 U$1.1
D8_: JP10.7 R6.2 U1.6 U2.6 U3.6 U4.6 U5.6 U6.6
D9: JP11.7 SV7.6
D9*: SV5.6 U$1.2
D9_: JP10.10 JP15.1
D10: SV7.4 U$2.DIR
D10*: SV5.4 U$1.3
D11: SV7.2 U$2.STEP
D11*: SV5.2 U$1.4
D12: CONLEFT.DIR SV7.1
D12*: SV5.1 U$1.5
D13: CONLEFT.STEP SV7.3
D13*: SV5.3 U$1.6
DP_: S6.2
GND: C1.2 C2.2 C3.2 C4.2 C5.2 C6.2 C7.2 C8.2 C9.2 C10.2 C11.2 C12.2 C13.2 C14.1 C15.1 C16.2 C17.1 C18.1 C19.1 C20.1 C21.1 C22.1 C23.1 C24.1 C25.1 C26.1 CONLEFT.GND0 CONLEFT.GND1 D1.C D3.C D5.C D6.C IC1.1 IC2.1 IC3.2 IC4.2 IRLED0.2 IRLED1.2 IRLED2.2 IRLED3.2 IRLED4.2 IRLED5.2 IRLED6.2 IRLED7.2 IRLED8.2 IRLED9.2 IRLED10.2 J3.1 J5.6 J5.7 JP10.6 JP10.11 JP11.6 JP11.11 JP12.7 JP12.8 JP21.2 JP23.2 JP24.1 JP25.1 LED1.4 LED2.4 LED3.4 LED4.4 LED5.4 LED6.4 LED7.4 LED8.4 LED9.4 LS1.- PTR1.2 PTR2.2 PTR3.2 PTR4.2 PTR5.2 PTR6.2 PTR7.2 PTR8.2 PTR9.2 PTR10.2 Q2.E Q3.E R5.2 R6.1 R32.1 S2.5 SV3.1 SV5.9 SV5.12 SV7.9 SV7.12 U1.2 U2.2 U3.2 U4.2 U5.2 U6.2 U7.2 U8.2 U$1.7 U$2.GND0 U$2.GND1
N$1: IRLED8.1 R22.2
N$2: IRLED1.1 R8.2
N$3: D6.A R28.2
N$4: D7.C JP23.4
N$5: JP14.2 S6.1
N$6: IRLED0.1 R31.2
N$7: IC3.4 JP1.1 JP13.2 LED1.1
N$8: JP2.2 JP3.1 LED2.3 LED3.1
N$9: JP3.2 JP4.1 LED3.3 LED4.1
N$10: JP4.2 JP5.1 LED4.3 LED5.1
N$11: JP5.2 JP6.1 LED5.3 LED6.1
N$12: JP6.2 JP7.1 LED6.3 LED7.1
N$13: IRLED2.1 R10.2
N$14: JP7.2 JP8.1 LED7.3 LED8.1
N$15: JP8.2 LED8.3 LED9.1
N$16: D1.A R1.2
N$17: SV1.1 U$2.B2
N$18: SV1.2 U$2.B1
N$19: SV1.3 U$2.A1
N$20: SV1.4 U$2.A2
N$21: D5.A R30.2
N$23: D3.A R4.2
N$24: IRLED3.1 R12.2
N$25: U$1.8
N$27: CONLEFT.B2 SV2.1
N$28: CONLEFT.B1 SV2.2
N$29: CONLEFT.A1 SV2.3
N$30: CONLEFT.A2 SV2.4
N$31: J3.2 S3.2
N$33: LS1.+ Q1.2
N$34: Q1.1 R3.1
N$35: IC4.3 R2.2 R5.1
N$45: C1.1 C2.1 C3.1 C4.1 C5.1 C6.1 C7.1 C8.1 C9.1 JP9.1 LED1.2 LED2.2 LED3.2 LED4.2 LED5.2 LED6.2 LED7.2 LED8.2 LED9.2
N$47: IRLED4.1 R14.2
N$51: IRLED5.1 R16.2
N$55: IRLED6.1 R18.2
N$59: IRLED7.1 R20.2
N$68: IRLED9.1 R24.2
N$69: JP14.1 JP15.2 S5.2
N$73: IRLED10.1 R26.2
N$85: JP1.2 JP2.1 LED1.3 LED2.1
N$86: D4.A S3.3 SJ1.1
PTB18*: J8.15 S2.4
PTB19*: J8.13 S2.6
PTC0*: J8.5 S2.1
PTC1: R32.2 SV6.4 U7.6 U8.6
PTC1*: J8.11 SV4.4
PTC5: SV6.9 U$2.EN
PTC5*: J8.1 SV4.9
PTC7: CONLEFT.EN SV6.7
PTC7*: J8.3 SV4.7
PTC8*: J8.9 S2.3
PTC9*: J8.7 S2.2
PTE26: J1.1 SV7.10
PTE26*: J7.1 SV5.10
SCL: IC4.5 JP11.9 JP27.2 SV3.3 SV7.7
SCL*: SV5.7 U$1.10
SCL_: JP10.8
SDA: IC4.4 JP11.8 JP27.1 SV3.4 SV7.5
SDA*: SV5.5 U$1.9
SDA_: JP10.9
VIN: C10.1 C12.1 C14.2 C15.2 CONLEFT.VMOT D4.C D7.A IC1.3 IC2.3 JP11.4 R1.1 R2.1 SJ1.2 U$2.VMOT
VIN*: J5.8 JP21.4
VIN_: JP10.13

## Tracks (layer width: path | path; a pad name or v marks a point on that pad's centre or on a via)
3V3REG  (via drill 0.35, 0.4, 0.55)
  Top 0.254: JP12.4 58.5,92 v58,92
  Top 0.406: SV3.2 48.19,32.25 v53,32.25 v70.5,32.25 | v74.25,32.25 74.25,33 76,34.75 91.66,34.75 CONLEFT.SLP | v75,51.5 75,57.25 78,60.25 82.5,60.25 84.25,62 v84.25,63.25
  Top 1.016: JP12.3 JP12.4
  Bottom 0.254: IC3.1 79.61,89.36 80.18,89.93 80.7,89.93 | JP12.4 60.5,91.04 60.5,93.25 60.62,93.38 U8.5 | U7.5 56.84,93.42 57.24,93.42 58,92.66 v58,92
  Bottom 0.305: 80.7,89.93 IC3.5 | IC3.1 73.36,89.36 73.25,89.25
  Bottom 0.406: v53,32.25 53.06,32.31 U$2.SLP | v70.5,32.25 v74.25,32.25
  Bottom 0.508: IC1.2 C11.1 | v75,51.5 75.03,51.47 75.03,47.76 74.32,47.04 74.32,32.32 v74.25,32.25
  Bottom 1.016: IC1.2 84.25,69 IC1.TAB v84.25,63.25
  Bottom 1.27: 84.25,69 81,69 80.25,69.75 80.25,76.75 79.25,77.75 75,77.75 72.75,80 72.75,85.25 71.75,86.25 | JP12.3 59.98,87.02 60.75,86.25 71.75,86.25 | 71.75,86.25 73.25,87.75 73.25,89.25 73.25,91 77,94.75 79.75,94.75 80.75,95.75 80.75,97.68 JP11.13
3V3REG_  (via drill 0.25, 0.35)
  Top 0.254: v29.25,32.5 v29.25,37.5 v29.25,42.5 29.25,63.87 27.43,65.68 | 27.43,65.68 29.25,67.5 v29.25,70.5 v29.25,75.5 29.25,80.02 29.48,80.25 v30.75,80.25 | 27.43,65.68 JP10.4
  Top 0.305: JP14.3 12.98,76.77 v12,77.75
  Top 0.61: R30.1 16.25,14.35 v16.25,16 16.25,18.65 R29.1 | v13,51.75 12.15,52.6 R28.1 R27.1
  Bottom 0.254: U2.5 v29.25,37.5 | v29.25,32.5 U1.5 | U3.5 v29.25,42.5 | U4.5 v29.25,70.5 | U5.5 v29.25,75.5 | U6.5 29.25,80 29.5,80.25 v30.75,80.25
  Bottom 0.305: v12,77.75 13.35,77.75 | S5.1 10.68,42.75 12.35,42.75 | R18.1 11.85,63.42
  Bottom 0.61: 14.85,15.75 15.1,16 v16.25,16 | 11.85,51.75 v13,51.75
  Bottom 0.813: 11.85,56.45 arc-90 C22.2 | R26.1 15.35,98.75 R25.1 15.35,93.05 C26.2 14.85,92.45 R24.1 14.35,89.75 R23.1 14.35,84.05 C25.2 13.85,83.45 R22.1 13.35,80.75 13.35,77.75 R21.1 13.35,75.05 C24.2 12.85,74.45 R20.1 12.35,71.75 12.35,70.5 | 12.35,70.5 R19.1 12.35,66.3 C23.2 11.85,64.2 11.85,63.42 12.5,62.77 12.5,59.4 R17.1 11.85,56.55 C22.2 | C22.2 11.85,56.45 | 11.85,56.45 R16.1 11.85,51.75 R15.1 12.9,48.7 C21.2 12.9,46.3 R14.1 12.35,44.75 12.35,42.75 R13.1 12.35,39.8 C20.2 12.85,37.7 R12.1 12.85,32.25 R11.1 13.35,30.05 C19.2 13.4,27.7 R10.1 13.85,23.25 R9.1 14.35,21.05 C18.2 14.4,18.7 R8.1 14.85,15.75 14.85,14.25 R7.1 15.35,12.05 C17.2 15.4,9.7 R31.1 | JP10.4 22.82,65.68 21.75,66.75 21.75,69.5 20.75,70.5 12.35,70.5
5VREG  (via drill 0.2, 0.35, 0.5, 0.55, 0.75)
  Top 0.305: v66.25,73 66.25,80.75 66,81
  Top 0.406: 63,86.42 63.2,86.62 63.38,86.62
  Top 0.508: SV7.11 63,86.42
  Top 1.016: v73.75,75.5 73.75,81 78.75,86 v78.75,88.25 | JP12.5 JP12.6 | v78.75,88.25 78.75,93.25 78.25,93.75 78.25,97.64 JP11.12 | JP9.2 78.73,88.23 v78.75,88.25
  Top 1.27: v70,79.25 67.75,79.25 66,81 66,84 63.38,86.62 62.52,87.48 JP12.5 | JP25.2 JP24.2
  Bottom 0.254: IC3.6 79.66,88.25 v78.75,88.25
  Bottom 0.305: IC4.1 62.44,71.73 C16.1 64.98,71.73 65.12,71.87 65.12,72.36 65.3,72.54 65.79,72.54 v66.25,73
  Bottom 1.016: IC2.TAB IC2.2
  Bottom 1.27: JP24.2 80.25,58.75 v75.75,63.25 IC2.TAB | IC2.2 C13.1 75.15,74.1 v73.75,75.5 v70,79.25
5VREG*
  Bottom 0.305: SV5.11 75.25,3.38 75.25,14 76.5,15.25 88.5,15.25 89.25,14.5 91.73,14.5 Q1.3
5VREG_
  Top 0.406: JP10.5 21.5,66.08 21.5,76.35 R4.1
A0  (via drill 0.35)
  Top 0.254: JP23.1 86.06,83.69 79.94,83.69 79.69,83.44 79.5,83.44 v79.25,83.19 | v71.25,92.75 72.25,92.75 73.25,91.75 73.25,85.5 v74.5,84.25 | v58.05,93.55 58.3,93.55 59.35,92.5 66.5,92.5 v66.75,92.25
  Bottom 0.254: v79.25,83.19 75.56,83.19 v74.5,84.25 | U7.4 57.57,94.03 v58.05,93.55
  Bottom 0.305: v66.75,92.25 arc-90 67.25,92.75 v71.25,92.75
A0*
  Bottom 0.254: JP21.1 34.25,8.75 34.25,4.75 33.25,3.75 16.43,3.75 J6.1
A0A
  Bottom 0.254: R7.2 PTR1.1 21,13.75 24.25,17 24.25,23.51 27.89,27.16 27.89,28.51 U1.3
A0B  (via drill 0.35)
  Top 0.254: R29.2 14.25,18.75 | 14.25,18.75 Q3.C | 14.25,18.75 14.25,19 15.5,20.25 22.5,20.25 23.25,21 23.25,22.5 v28.75,28
  Bottom 0.254: v28.75,28 28.75,28.05 29.05,28.34 29.54,28.34 29.71,28.51 29.71,29 U1.1
A0C
  Bottom 0.254: U7.3 53.74,95 51.75,95 50.2,96.55 JP11.1
A0D
  Bottom 0.254: U7.1 56.92,90.5 57.42,90.5 JP12.2
A0S
  Bottom 0.254: U1.4 24.68,35.2 JP10.16
A1  (via drill 0.35)
  Top 0.254: JP23.3 88.25,81.5 88.25,83.75 87.91,84.09 79.77,84.09 79.52,83.84 v78.5,83.84 | v71.25,93.75 72.5,93.75 73.75,92.5 73.75,86.25 v75.5,84.5
  Bottom 0.254: v78.5,83.84 78.5,84 76,84 v75.5,84.5
  Bottom 0.305: U8.4 61.54,94.29 62.5,95.25 68.75,95.25 70.25,93.75 v71.25,93.75
A1*
  Bottom 0.305: J6.2 14.38,4.25 30.75,4.25 31.84,5.34 31.84,8.88 JP21.3
A1A  (via drill 0.35)
  Top 0.254: v26.5,34.75 25.5,33.75 v22.25,33.75
  Bottom 0.254: R9.2 PTR2.1 19.3,22.75 22.17,25.62 22.19,25.62 22.25,25.68 v22.25,33.75 | U2.3 28.05,34.75 v26.5,34.75
A1B  (via drill 0.35)
  Top 0.254: v21,33.5 21.41,33.09 26.84,33.09 v27.5,33.75
  Bottom 0.254: R11.2 17.5,31.75 | 17.5,31.75 PTR3.1 | U2.1 29.71,34 29.71,33.51 29.54,33.34 28.3,33.34 27.89,33.75 v27.5,33.75 | v21,33.5 19.25,33.5 17.5,31.75
A1C
  Bottom 0.254: U8.3 59.15,94.34 58.11,94.34 57.45,95 55,95 52.74,97.26 JP11.2
A1D
  Bottom 0.254: JP12.1 58.23,87.98 58.75,88.5 58.75,92.01 U8.1
A1S
  Bottom 0.254: U2.4 27.14,37.74 JP10.15
A2  (via drill 0.35)
  Top 0.254: JP26.1 86.98,57.48 89,59.5 89,76.75 91.25,79 91.25,83.75 90.5,84.5 v79.25,84.5 | v76,85.5 74.25,87.25 74.25,92.75 72.25,94.75 v71.25,94.75
  Top 0.305: v69.75,95.75 59.4,95.75 v59.32,95.82
  Bottom 0.254: v79.25,84.5 77,84.5 v76,85.5
  Bottom 0.305: v71.25,94.75 70.25,95.75 v69.75,95.75 | JP11.3 57.21,95.82 v59.32,95.82
A2*
  Bottom 0.305: JP22.1 6.25,8.75 6.25,5.91 J6.3
A2A
  Bottom 0.254: R13.2 16.5,40.75 | 16.5,40.75 PTR4.1 | U3.3 28.45,39.06 18.19,39.06 16.5,40.75
A2B  (via drill 0.25, 0.3)
  Top 0.254: Q2.C 8.48,55.25 R27.2 11.25,54.35 11.25,51 19.5,42.75 v21.25,42.75 21.25,42.5 22.25,41.5 23.7,41.5 26.25,41.5 v27.5,40.25
  Bottom 0.254: U3.1 29.91,39.84 29.5,40.25 v27.5,40.25
A2S
  Bottom 0.254: U3.4 25.21,41.29 24.44,40.52 JP10.14
A3
  Top 0.254: JP26.2 89.52,76.69 91.66,78.83 91.66,83.92 90.67,84.91 86.34,84.91 85.25,86 85.25,95.72 JP11.14
A3*
  Top 0.305: J6.4 7.52,2.47 JP22.2
A3A  (via drill 0.35 pad 0.6)
  Top 0.254: v26.75,60.5 25.63,59.38 22.88,59.38 21,57.5 21,52.5 20,51.5 v17.5,51.5
  Bottom 0.254: R15.2 PTR5.1 16.05,50.05 v17.5,51.5 | v26.75,60.5 26.75,64.25 27.5,65 28,65 28.59,65.59 U4.3
A3B  (via drill 0.35 pad 0.6)
  Top 0.254: v28,63.5 26.42,61.92 22.42,61.92 21,60.5 v17.5,60.5
  Bottom 0.254: R17.2 PTR6.1 16.05,59.05 v17.5,60.5 | U4.1 29.91,65.41 v28,63.5
A3S
  Bottom 0.254: U4.4 25.53,69.29 24.46,68.22 JP10.3
A4
  Top 0.254: JP26.3 88.48,53.73 89.95,53.73 90.56,54.34 90.56,55.2 90,55.76 90,76.6 92.06,78.66 92.06,84.09 90.84,85.31 86.75,85.31 85.76,86.3 JP11.15
A4*
  Top 0.254: J6.5
  Top 0.305: JP22.3 6.25,8.75 6.25,3.74 J6.5
A4A  (via drill 0.35)
  Top 0.305: v18.25,69.25 18.25,73.5 v17.25,74.5
  Bottom 0.254: R19.2 PTR7.1
  Bottom 0.305: PTR7.1 18.05,69.25 v18.25,69.25 | v17.25,74.5 17.75,74 20.75,74 22.79,71.96 28.54,71.96 28.59,72.01 U5.3
A4B
  Bottom 0.254: R21.2 17.5,76.75 | 17.5,76.75 PTR8.1 | U5.1 29.91,72.84 29.5,73.25 27.25,73.25 25.75,74.75 19.25,74.75 17.5,76.5 17.5,76.75
A4S  (via drill 0.35 pad 0.6)
  Top 0.254: JP10.2 26.51,70.76 28,72.25 v28,75.5
  Bottom 0.254: U5.4 28,74.88 v28,75.5
A5
  Top 0.254: JP26.4 90.97,53.68 90.97,55.37 90.41,55.93 90.41,76.43 92.47,78.5 92.47,84.25 91,85.72 89,85.72 88.3,86.42 JP11.16
A5*
  Top 0.305: JP22.4 4.98,5 J6.6
A5A
  Bottom 0.254: R23.2 PTR9.1 18.55,85.7 20,84.25 22,84.25 22.61,83.64 22.61,77.89 23.29,77.21 U6.3
A5B  (via drill 0.35)
  Top 0.254: v27.59,78.25 26.99,78.25 26.34,77.61 24.16,77.61 22.61,79.16 22.61,81.34 24.25,82.99 v24.25,83.75
  Bottom 0.254: R25.2 PTR10.1 21.55,92.75 23.25,92.75 24.25,91.75 v24.25,83.75 | U6.1 29.91,77.84 29.5,78.25 v27.59,78.25
A5S  (via drill 0.35)
  Top 0.254: JP10.1 24.55,73.3 28.25,77 v28.25,80.5
  Bottom 0.254: v28.25,80.5 28.59,80.16 U6.4
D0  (via drill 0.35)
  Top 0.305: U$2.M0 44.72,34.33 66.39,34.33 67.13,35.07 67.13,46.12 v65.25,48 | v63,51 61.77,52.23 SV6.10
  Bottom 0.305: v65.25,48 63,50.25 v63,51
D0*
  Top 0.305: J8.16 40.9,17.19 39.71,16 39.71,13.5 40.46,12.75 41.5,12.75 41.75,12.5 41.75,2.5 42.33,1.92 SV4.10
D1  (via drill 0.35)
  Top 0.305: U$2.M1 46.8,34.79 66.2,34.79 66.67,35.26 66.67,45.58 v64.25,48 | v62,51 57.75,51 57.04,51.71 SV6.8
  Bottom 0.305: v64.25,48 62,50.25 v62,51
D1*
  Top 0.305: J8.14 42.37,15.95 42.37,5.57 SV4.8
D2  (via drill 0.35)
  Top 0.305: CONLEFT.M0 81.98,36.15 80.83,37.29 79.89,37.29 79.84,37.25 v73.5,37.25 | v70.25,37.25 70.25,47.34 v70.91,48
  Bottom 0.305: v73.5,37.25 v70.25,37.25 | v70.91,48 70.91,51.09 72.17,52.35 72.17,52.65 70.15,54.67 65.8,54.67 63.97,56.5 52,56.5 50.75,55.25 50.75,53.25 49.73,52.23 SV6.2
D2*
  Top 0.305: SV4.2 43.48,12.76 44.91,14.19 44.91,15.17 46.16,16.41 J8.12
D3  (via drill 0.35)
  Top 0.305: SV6.6 55.75,53.48 55.75,56.75 57.5,58.5 v62.25,58.5 | v77.75,57 80.75,57 81.5,56.25 81.5,53.54 JP25.3
  Bottom 0.305: v62.25,58.5 66.75,58.5 68.25,57 v77.75,57
D3*
  Top 0.305: SV4.6 43.48,8.1 44.95,9.58 44.95,12.92 45.26,13.23 46,13.25 46.51,13.25 47.45,14.19 47.45,15.95 J8.10
D4  (via drill 0.35)
  Top 0.305: CONLEFT.M1 84.52,36.15 80.91,39.76 75.05,39.76 75.04,39.75 v73.5,39.75
  Bottom 0.305: v73.5,39.75 73,40.25 73,52.5 70.36,55.14 66.11,55.14 64.25,57 51.65,57 SV6.1
D4*
  Top 0.305: SV4.1 47.25,13.31 47.25,13.34 47.33,13.42 48.17,13.42 48.18,13.41 49.21,13.41 49.94,14.14 49.94,15.9 J8.8
D5  (via drill 0.35)
  Top 0.305: SV6.3 51.96,58.46 v53,59.5 | v56.25,59.5 v62.25,59.5 | v81.75,58 v77.75,58
  Bottom 0.305: v53,59.5 v56.25,59.5 | JP24.3 82.79,56.96 v81.75,58 | v77.75,58 68.25,58 66.75,59.5 v62.25,59.5
D5*
  Top 0.305: SV4.3 47.04,10.56 47.04,12.45 47.54,12.95 49.4,12.95 49.86,13.41 51.75,13.41 52.5,14.16 52.5,16 53.69,17.19 J8.6
D6  (via drill 0.35)
  Top 0.305: SV6.5 55.29,55.56 55.29,59.51 56.28,60.5 v62.25,60.5 | v67.75,59.75 v70.75,59.75 | v73.75,73.5 75.5,75.25 v75.5,80.75 | v80,86.25 80,91.04 v79.79,91.25
  Bottom 0.305: v62.25,60.5 67,60.5 v67.75,59.75 | v70.75,59.75 71.75,60.75 71.75,72.5 72.75,73.5 v73.75,73.5 | v75.5,80.75 77.25,82.5 79.53,82.5 80,82.97 v80,86.25 80.09,86.34 JP13.1 | v79.79,91.25 79.79,91 79.44,90.66 IC3.3
D6*
  Top 0.305: SV4.5 47.49,8.47 47.49,12.24 47.74,12.49 49.59,12.49 50.05,12.95 51.94,12.95 52.4,13.41 54.29,13.41 55.02,14.14 55.02,15.17 55,15.19 55,16 56.19,17.19 J8.4
D7*
  Bottom 0.305: J8.2 58.85,17.14 60.13,15.87 74.44,15.87 74.56,15.75 87.5,15.75 88.18,16.43 R3.2
D8  (via drill 0.35)
  Top 0.254: v68.5,85 67.75,85.75 v67.75,89.75
  Top 0.305: SV7.8 55.75,81.71 55.75,83.5 56.25,84 57.5,84 58,83.5 58,82.25 58.75,81.5 v64.75,81.5
  Bottom 0.254: v64.75,81.5 65.25,81.5 67.11,83.36 67.11,83.39 68.5,84.78 v68.5,85
  Bottom 0.305: v67.75,89.75 70.5,89.75 73.06,92.31 JP11.10
D8*
  Top 0.305: SV5.8 70,8.71 70,11.71 69.55,12.16 69.55,14.75 69.28,15.02 68.59,15.02 68.36,15.25 64.57,15.25 U$1.1
D8_  (via drill 0.25, 0.35 pad 0.6)
  Top 0.254: v30.5,70.5 v30.5,42.5 | v27.75,58 24.5,58 JP10.7
  Bottom 0.254: U4.6 29.91,69.91 v30.5,70.5 | v30.5,70.5 30.5,74.25 | 30.5,74.25 30.5,78.7 U6.6 | U5.6 30.46,74.29 30.5,74.25 | U1.6 30.5,31.88 30.5,36.25 | 30.5,36.25 v30.5,42.5 | U3.6 30.5,41.88 v30.5,42.5 | U2.6 29.95,36.25 30.5,36.25 | v30.5,42.5 30.5,43.65 R6.2 | v30.5,70.5 30.5,60 28.5,58 v27.75,58
D9
  Top 0.305: JP11.7 65.44,99.06 64.75,99.75 48.75,99.75 48,99 48,96.5 49,95.5 51.5,95.5 53,94 53,81.5 SV7.6
D9*
  Top 0.305: U$1.2 66.61,15.75 68.5,15.75 68.78,15.47 69.78,15.47 70.01,15.24 70.01,12.35 71.48,10.87 SV5.6
D9_  (via drill 0.35)
  Top 0.305: JP15.1 17.5,40.99 v17.5,42.75 | v20.5,44 20.5,49.25 21.5,50.25 24.25,50.25 JP10.10
  Bottom 0.305: v17.5,42.75 19.25,42.75 v20.5,44
D10  (via drill 0.35)
  Top 0.305: U$2.DIR 59.03,37.04 63.52,37.04 64.93,38.46 64.93,45.9 63.45,47.38 62.62,47.38 v62.25,47.75 | v62.25,55 63.54,56.29 63.54,75.06 61.68,76.93 49.32,76.93 v49.25,77
  Bottom 0.305: v62.25,47.75 60.75,49.25 60.75,53.5 v62.25,55 | v49.25,77 49.19,77.06 SV7.4
D10*
  Top 0.305: U$1.3 68.97,15.93 70,15.93 70.46,15.47 70.46,14.43 71.48,13.41 SV5.4
D11  (via drill 0.35)
  Top 0.305: U$2.STEP 56.95,37.5 63.33,37.5 64.25,38.42 v64.25,45 | v63.5,55 64.25,55.75 64.25,75.75 62.25,77.75 49.13,77.75 SV7.2
  Bottom 0.305: v64.25,45 64.25,46.75 61.25,49.75 61.25,52.75 v63.5,55
D11*
  Top 0.305: U$1.4 71.48,15.96 SV5.2
D12  (via drill 0.35)
  Top 0.305: CONLEFT.DIR 96.33,37.96 84.25,37.96 81.46,40.75 80.5,40.75 78.96,42.29 78.96,46.52 78.25,47.23 v78.25,48 | v67.25,56.75 66.08,57.92 66.08,65.08 v66.5,65.5
  Bottom 0.305: v67.25,56.75 67.5,56.5 71,56.5 75.71,51.79 75.71,50.54 v78.25,48 | v66.5,65.5 66.43,65.57 62.04,65.57 51.99,75.61 48.53,75.61 47.72,76.42 47.72,81.89 46.83,82.77 SV7.1
D12*
  Top 0.305: U$1.5 72.85,16.02 SV5.1
D13  (via drill 0.35)
  Top 0.305: CONLEFT.STEP 94.25,37.5 83.81,37.5 81.02,40.29 80.31,40.29 78.5,42.1 78.5,46.33 76.83,48 v73.75,48 | v66.5,56 65.62,56.88 65.62,66.12 v66,66.5
  Bottom 0.305: v73.75,48 74.21,48.46 74.21,52.44 70.8,55.85 66.65,55.85 v66.5,56 | v66,66.5 62,66.5 52.43,76.07 48.97,76.07 48.17,76.86 48.17,81.9 49.04,82.77 SV7.3
D13*
  Top 0.305: SV5.3 74.02,13.41 75.04,14.43 75.04,16.77 U$1.6
GND  (via drill 0.25, 0.35, 0.55)  (6 unrouted)
  Top 0.254: D3.C 12.45,96.29 v12.5,96.25
  Top 0.305: D1.C 96,22.74 | v60.75,17.5 v60.75,14.25 | S2.5 35.81,15.25 v36,15.25 | JP12.8 63.74,91.84 v63.5,91.84 | v69,93.75 67.75,95 v60.75,95 | v21.75,37.75 v21.75,40.25
  Top 0.406: v41,40.5 48.25,40.5 49.13,41.38 49.13,43.87 48.5,44.5 v41,44.5 | v98.25,40.5 98,40.75 90,40.75 89.5,41.25 89.5,44 90,44.5 v98.25,44.5
  Top 0.508: v82.75,89.5 82.75,91.5 v82.5,91.75 | Q2.E 9.77,56.5 v15.25,56.5 | v16.75,47.75 v19.25,47.75 | v11.25,35.25 12.5,34 v14.5,34 | v12.5,25.25 12.75,25 v15.5,25 | v28,38 27.25,37.25 v27.25,36
  Top 0.61: SV7.9 56.81,82.19 58.77,80.23 SV7.12 | v55.25,70.75 v57.75,73.25
  Top 0.813: v76,25.25 v76,23.25 | D1.C 94.6,22.65 v94.5,22.75 | C15.1 50.75,40.9 v50.75,40.25 | v98.25,61 97.75,61.5 v93.25,61.5 91.09,61.5 | v66.75,53.5 69.25,56 v69.25,59 | U$2.GND0 44.3,50.25 56.74,50.25 U$2.GND1 | v48.75,26.25 48.75,22.75 v48.5,22.5
  Top 1.27: CONLEFT.GND0 82.9,44.6 85.25,42.25 C14.1 87.5,41.4 v87.5,41
  Bottom 0.203: v36,15.25 36.25,15
  Bottom 0.305: 83.87,87.53 LED1.4 | U8.2 60.01,93.38 60.35,93.71 60.35,94.6 v60.75,95 | LED4.4 v89.75,26.25
  other vias: 98.25,59 98.25,63 98.25,65 98.25,70 40.25,65 40.25,63 40.25,61 40.25,59 40.25,70 40.25,72 40.25,74 40.25,76 98.25,76 98.25,74 98.25,72 91.06,61.5
  pour Bottom (rank 3, no thermals): -4.75,106.25 113.25,107 113,-17 -4.25,-9.25
N$1
  Bottom 0.254: R22.2 IRLED8.1
N$2
  Bottom 0.254: R8.2 IRLED1.1
N$3
  Top 0.254: R28.2 10.35,52.58 D6.A
N$4
  Top 1.016: JP23.4 89.52,79.02 88.25,77.75 84,77.75 82.85,78.9 D7.C
N$5
  Top 0.305: JP14.2 10.68,75.75 S6.1
N$6
  Bottom 0.254: R31.2 IRLED0.1
N$7
  Bottom 0.254: JP1.1 83.88,90.36 83.88,90.5 | 83.88,90.5 LED1.1 | IC3.4 81.75,90.66 83.72,90.66 83.88,90.5
  Bottom 0.305: JP13.2 81.75,90.66
N$8
  Bottom 0.254: JP3.1 91.88,54.28 91.88,54.5 LED3.1 | JP2.2 93.62,72.27 LED2.3
  Bottom 0.305: 91.88,54.5 91.82,54.56 91.82,69.94 LED2.3
N$9  (via drill 0.2)
  Top 0.254: v93.75,47.25 91.75,45.25 89.75,45.25 88.75,44.25 v88.75,38.75
  Bottom 0.254: JP4.1 92.25,27.38 LED4.1 90.5,29.12 90.5,33 89.25,34.25 89.25,38.25 v88.75,38.75 | JP3.2 93.62,51.72 LED3.3 94.5,50.38 94.5,49.33 94.48,49.31 94.48,48.39 94.5,48.37 94.5,48 v93.75,47.25
N$10
  Bottom 0.254: LED5.1 70.12,26.5 JP5.1 | JP4.2 93.12,25.22 LED4.3
  Bottom 0.305: LED5.1 90.4,27.38 91.74,26.03 92.19,26.03 JP4.2
N$11
  Bottom 0.254: LED5.3 68.38,26.5 JP5.2
  Bottom 0.305: LED5.3 66.88,25 LED6.1 46.25,25.88 JP6.1
N$12  (via drill 0.35)
  Top 0.305: v51.75,37.5 51.75,40.17 52.93,41.34 53.68,41.34 53.85,41.52 53.85,42.27 v54.58,43
  Bottom 0.305: v51.75,37.5 51.75,34.88 45.44,28.56 | v54.58,43 49.12,48.46 49.12,49.75 LED7.1 46.62,52.58 JP7.1 | LED6.3 45.44,28.56 | JP6.2 45.44,27.97 45.44,28.56
N$13
  Bottom 0.254: R10.2 IRLED2.1
N$14  (via drill 0.35)
  Top 0.305: v46.5,57.5 v46.5,69.5
  Bottom 0.254: JP8.1 46.62,72.22 LED8.1
  Bottom 0.305: JP7.2 45.61,55.02 LED7.3 46.5,57.38 v46.5,57.5 | v46.5,69.5 46.62,69.62 LED8.1
N$15  (via drill 0.35)
  Top 0.305: v47.25,86.5 v47.25,89
  Bottom 0.254: JP8.2 44.88,74.78 LED8.3 44.88,76
  Bottom 0.305: 44.88,76 44.88,77.59 45.06,77.77 45.06,84.31 v47.25,86.5 | v47.25,89 48.83,89 49.93,90.1 51.4,90.1 51.75,89.75 51.75,89 52.25,88.5 54,88.5 54.66,87.84 LED9.1
N$16
  Top 0.305: R1.2 D1.A
N$17  (via drill 0.6)
  Top 1.016: v53.77,38.75 62.2,38.75 SV1.1
  Bottom 1.016: U$2.B2 45.44,48.72 46.81,47.35 47.22,47.35 52.12,42.46 52.12,40.4 v53.77,38.75
N$18  (via drill 0.6)
  Top 1.016: v54.18,40.65 61.67,40.65 SV1.2
  Bottom 1.016: U$2.B1 47.98,48.35 53.54,42.79 53.54,41.28 v54.18,40.65
N$19
  Bottom 1.016: SV1.3 55.85,43.77 50.77,48.85 U$2.A1
N$20
  Bottom 1.016: U$2.A2 55.6,46.31 SV1.4
N$21
  Top 0.254: R30.2 D5.A
N$23  (1 unrouted)
  Top 0.254: R4.2 10.75,91.19 D3.A
N$24
  Bottom 0.254: R12.2 IRLED3.1
N$27
  Bottom 1.016: CONLEFT.B2 85.44,48.65 83.1,46.31 SV2.1
N$28
  Bottom 0.813: CONLEFT.B1 87.98,48.8
  Bottom 1.016: SV2.2 82.95,43.77 87.98,48.8
N$29  (via drill 0.6)
  Top 1.016: v85.92,44.33 90.44,48.85 CONLEFT.A1
  Bottom 1.016: SV2.3 82.82,41.23 v85.92,44.33
N$30  (via drill 0.6)
  Top 1.016: v91.08,46.95 91.16,46.95 CONLEFT.A2
  Bottom 1.016: v91.08,46.95 88.45,46.95 87.25,45.75 87.25,43.25 82.69,38.69 SV2.4
N$31
  Top 1.27: J3.2 83.55,33.5 90.43,33.5 S3.2
N$33
  Bottom 0.305: Q1.2 94.66,18.05 LS1.+
N$34
  Bottom 0.305: R3.1 90.09,18.05 Q1.1
N$35
  Bottom 0.254: IC4.3 60.47,72.72 60.75,73 65.25,73 65.25,74 | R5.1 65.35,74.1 65.25,74 | 65.25,74 65.15,74.1 R2.2
N$45  (via drill 0.35)
  Top 0.508: v44.75,68.5 44.75,52.25 v45.75,51.25 | v95.25,51 94.28,51.97 v94.28,60.25 | v49.25,38.75 49.75,39.25 49.75,41.47 49.74,41.48 49.74,42.52 49.75,42.53 49.75,44.75 49.25,45.25 v44.25,45.25 | v59,85.5 60.23,86.73 60.5,86.73 61.25,87.49 v61.25,89.25 | v70.5,91.75 70.47,91.78 70.47,95.08 70.92,95.53 71.58,95.53 71.61,95.5 74.5,95.5 76,94 JP9.1
  Bottom 0.406: C5.1 72.89,25.62 LED5.2
  Bottom 0.508: 85.62,93.12 87.71,91.04 C1.1 | 93.62,76.64 LED2.2 94,75.25 94.71,74.54 94.71,60.68 v94.28,60.25 94.28,57 93.79,56.51 C3.1 93.17,55.21 LED3.2 | 93.62,76.64 C2.1 | C8.1 44.79,70.21 | 44.79,70.21 44.88,70.3 LED8.2 44.88,72.44 44.04,73.27 44.04,77.54 44.5,78 44.5,85.25 46.79,87.54 C9.1 52.94,87.46 LED9.2 54.15,86.25 56,86.25 56.75,85.5 v59,85.5 | C7.1 44.88,51.56 LED7.2 | LED4.2 93.38,27.99 94.25,27.99 | 94.25,27.99 C4.1 95.39,31.86 91.77,35.48 91.77,37.42 88.84,40.34 88.84,44.67 89.83,45.66 94.17,45.66 96.84,48.33 96.84,50.25 96.1,51 v95.25,51 | C7.1 45.18,50.68 v45.75,51.25 | v44.75,68.5 44.79,68.79 44.79,70.21 | 94.25,27.99 94.25,24 93.5,23.25 91.38,23.25 91.37,23.25 88.37,26.25 85.75,26.25 83.75,24.25 72.9,24.25 | JP9.1 76,91.75 77.5,93.25 85.5,93.25 85.62,93.12 | C5.1 72.9,24.25 | v49.25,38.75 49.27,38.72 49.27,34.53 44.25,29.5 44.25,26.12 LED6.2 46.1,24.28 C6.1 47.75,23.5 48.5,24.25 72.9,24.25 | C7.1 44.2,50.48 44.2,45.31 v44.25,45.25 | v61.25,89.25 61.27,89.28 63.04,89.28 63.77,90 63.77,90.98 64.54,91.77 66.13,91.77 66.42,91.47 70.22,91.47 arc90 v70.5,91.75 | 93.62,76.64 93.62,81.66 90.23,85.06 89.69,85.06 86.5,88.25 86.5,90.12 LED1.2 85.62,93.12
N$47
  Bottom 0.254: R14.2 IRLED4.1
N$51
  Bottom 0.254: R16.2 IRLED5.1
N$55
  Bottom 0.254: R18.2 IRLED6.1
N$59
  Bottom 0.254: R20.2 IRLED7.1
N$68
  Bottom 0.254: R24.2 IRLED9.1
N$69  (via drill 0.35)
  Top 0.305: S5.2 JP15.2 13.24,41.74 v14.75,43.25 | v18,65.75 13.75,70 JP14.1
  Bottom 0.305: v14.75,43.25 15.59,44.09 17.05,44.09 18.18,45.23 18.18,60.78 18,60.97 v18,65.75
N$73
  Bottom 0.305: R26.2 IRLED10.1
N$85
  Bottom 0.254: JP2.1 91.88,74.83 LED2.1 | JP1.2 85.62,87.8
  Bottom 0.305: 85.62,87.8 LED1.3 85.62,86.12 87.25,84.5 90,84.5 91.88,82.62 LED2.1
N$86
  Top 1.27: S3.3 97.62,24.67 D4.A 94.38,24.64 94.02,25 SJ1.1
PTB18*  (via drill 0.35)  (1 unrouted)
  Top 0.305: S2.4 | v37.5,17.25 37.3,17.45 S2.4
  Bottom 0.305: J8.15 40.1,14.65 v37.5,17.25
PTB19*  (1 unrouted)
  Top 0.305: J8.13 44.86,15.9 44.86,17.71 43.92,18.64 34.68,18.64 33.23,17.19 33.23,15.82 S2.6 | S2.6
PTC0*  (via drill 0.5)  (1 unrouted)
  Top 0.305: S2.1 31.75,21.33 v31.75,21.25
  Bottom 0.305: v31.75,21.25 32.19,21.25 32.8,21.86 35.14,21.86 38.5,18.5 52.25,18.5 52.5,18.25 52.5,15.5 53.35,14.65 J8.5
PTC1  (via drill 0.35)
  Top 0.254: v53.75,92 53.8,91.95 54.25,91.95 v56.7,91.95 57.02,91.95 57.73,92.66 58.42,92.66 59.12,91.95 61.05,91.95 v61.25,91.75
  Top 0.305: SV6.4 53.25,53.52 53.25,57.75 54.04,58.54 54.04,59.94 55.69,61.58 61.19,61.58 62.88,63.27 62.88,69.87 56.5,76.25 45.5,76.25 44.5,77.25 44.5,84.25 45.5,85.25 v50.5,85.25 | v54.25,85.25 54.25,91.95
  Bottom 0.254: U7.6 56.79,92.04 v56.7,91.95 | v53.75,92 52.62,93.12 R32.2 | v61.25,91.75 61.54,92.04 U8.6
  Bottom 0.305: v50.5,85.25 v54.25,85.25
PTC1*
  Top 0.305: SV4.4 43.48,10.64 44.5,11.66 44.5,13.13 44.81,13.44 J8.11
PTC5  (via drill 0.35)
  Top 0.305: U$2.EN 42.64,33.87 66.58,33.87 67.59,34.88 67.59,46.66 v66.25,48 | v64,51 60.23,54.77 SV6.9
  Bottom 0.305: v66.25,48 64,50.25 v64,51
PTC5*
  Bottom 0.305: SV4.9 46.02,3.02 47.71,4.71 47.71,12.5 48,12.79 55.1,12.79 55.76,13.45 55.8,13.41 57.61,13.41 J8.1
PTC7  (via drill 0.35)
  Top 0.305: CONLEFT.EN 73.65,36.15 v73.5,36 | v69.25,48 v69.25,36
  Bottom 0.305: v73.5,36 v69.25,36 | v69.25,48 67,50.25 v67,51 65.5,52.5 65.5,54.25 63.75,56 58,56 57.04,55.04 SV6.7
PTC7*
  Bottom 0.305: SV4.7 47.25,5.69 47.25,12.75 47.75,13.25 54.91,13.25 J8.3
PTC8*  (via drill 0.5)  (1 unrouted)
  Top 0.305: S2.3 29.65,19.4 v29.65,19.35
  Bottom 0.305: v29.65,19.35 29.65,18.93 29.05,18.33 29.05,16.93 30.05,15.94 31.45,15.94 32.76,17.25 36.25,17.25 40.25,13.25 47.1,13.25 47.56,13.71 47.75,13.71 J8.9
PTC9*  (via drill 0.5)  (1 unrouted)
  Top 0.305: S2.2 30.75,20.31 v30.75,20.25
  Bottom 0.305: v30.75,20.25 32.23,18.77 37.23,18.77 40.05,15.95 50.75,15.95 51.23,15.46 J8.7
PTE26  (via drill 0.35)
  Top 0.305: J1.1 70.75,87 v70.75,84.75 | v64.25,78.5 58.54,78.5 SV7.10
  Bottom 0.305: v64.25,78.5 64.5,78.5 66.33,80.33 70.15,80.33 71.42,81.6 71.42,83.4 70.75,84.07 v70.75,84.75
PTE26*
  Top 0.305: J7.1 64.5,14.5 64.75,14.75 68.21,14.75 68.4,14.56 68.94,14.56 69.09,14.41 69.09,11.97 69.54,11.52 69.54,8.46 70.25,7.75 70.25,5.5 71.06,4.69 SV5.10
SCL  (via drill 0.35)
  Top 0.254: v67.06,84.94 67.06,90.44 v67,90.5
  Top 0.305: SV3.3 43.3,28.08 48.18,32.96 66.96,32.96 68.5,34.5 68.5,47.75 v68.22,48.03 | v66,51 65.16,51.84 65.16,67.16 v65.5,67.5 | v61.5,75.75 v59,75.75
  Bottom 0.305: JP11.9 70.52,96.73 72.5,94.75 72.5,92.5 70.5,90.5 v67,90.5 | v67.06,84.94 65.17,84.94 JP27.2 61.77,84 55.5,84 SV7.7 54.27,82.98 53.25,84 51,84 50.5,83.5 50.5,79.17 53.96,75.71 | v68.22,48.03 66,50.25 v66,51 | v65.5,67.5 65.43,67.57 62.1,67.57 53.96,75.71 | IC4.5 61.5,75.04 v61.5,75.75 | v59,75.75 54,75.75 53.96,75.71
SCL*
  Top 0.305: SV5.7 74.02,8.33 75.04,9.35 75.04,10.19 75.02,10.2 75.02,11.23 75.49,11.7 75.49,13.59 75.95,14.05 75.95,15.24 76,15.29 83.72,15.29 U$1.10
SDA  (via drill 0.35)
  Top 0.305: JP11.8 67.98,98.48 66.25,100.21 48.56,100.21 47.54,99.19 47.54,96.31 51.73,92.12 SV7.5 | SV3.4 45.2,30.62 47.99,33.42 66.77,33.42 68.04,34.69 68.04,47.21 v67.25,48 | v65,51 64.71,51.29 64.71,68.21 v65,68.5
  Bottom 0.305: SV7.5 53,81.5 61.73,81.5 JP27.1 60.47,77.7 IC4.4 60.47,73.34 59.62,72.48 59.62,70.94 62,68.57 64.93,68.57 v65,68.5 | v67.25,48 65,50.25 v65,51
SDA*
  Top 0.305: SV5.5 74.02,10.87 75.04,11.89 75.04,13.78 75.49,14.24 75.49,15.5 75.74,15.75 81.64,15.75 U$1.9
VIN  (via drill 0.35, 0.55)
  Top 0.305: 89.44,24.67 R1.1
  Top 0.406: v69.25,76.75 72.25,76.75
  Top 1.016: 56.59,46.5 56.59,42.06 C15.2 | CONLEFT.VMOT 80.36,43.74 C14.2 | D7.A 78.15,69.15 v78,69
  Top 1.27: 72.25,49.5 72.25,31 78.61,24.64 D4.C 87.46,24.67 89.44,24.67 91.4,24.67 91.48,24.75 SJ1.2 | 72.25,49.5 72.25,69 | 72.25,69 72.25,76.75 72.25,89.25 71.17,90.33 69.02,90.33 68.08,91.27 68.08,92.67 67.25,93.5 60,93.5 57.82,95.68 JP11.4 | 72.25,69 v78,69 v86.25,69 | U$2.VMOT 40.36,47.39 41.25,46.5 56.59,46.5 59.25,46.5 62.25,49.5 72.25,49.5 | 72.25,49.5 79.71,49.5 CONLEFT.VMOT
  Bottom 0.305: R2.1 65.1,76.75 v69.25,76.75
  Bottom 0.508: IC2.3 78.06,73.91 C12.1 | IC1.3 86.56,73.91 C10.1
  Bottom 1.016: IC2.3 78.06,69.13 v78,69 | v86.25,69 86.56,69.31 IC1.3
VIN*
  Top 1.27: JP21.4 29.75,4.25 21,4.25 20.35,3.6 J5.8
(copper drawn outside any net)
  shapes: Bottom area x12, Top area x5

## Text on the board
tPlace: A0 | A1 | A2 | VIN | NC | GND | D9 | SDA | SCL | D8 | GND | 5V | 3V3 | A3 | A4 | A5 | A0 | 3V3 | 5V | GND | A0 | 3V3 | 5V | GND | D12 | D13 | SDA | SCL | GND | 5V | A0 | GND | SDA | SCL | D11 | D10 | D9 | D8 | PTE26 | GND | A1 | VIN | A5 | A4 | A3 | LEFT STEPPER MOTOR / NEMA 8 | RIGHT STEPPER MOTOR / NEMA 8 | 3V3 | 5V | GND | D8 | D4 | D5 | D6 | PTC7 | PTC5 | GND | 5V | D5 | A2 | A3 | SCL | SDA | D9 | D2 | PTC1 | D3 | D1 | D0 | GND | 5V | D3 | A4 | A5 | GND | VIN | GND | B2 | B1 | A1 | A2 | FLT | GND | VMOT | D2 | B2 | B1 | A1 | A2 | FLT | GND | NC | VIN | A2 | A1 | EN | M0 | M1 | CONF | VREF | SLP | STEP | DIR | EN | M0 | M1 | CONF | VREF | SLP | STEP | DIR | A0 | SDA | SCL | 3V3 | 3 | 1 | 1 | 3 | GND | 2 | 2 | Joystick | D0 | D1 | D2 | D3 | D4 | D5 | D6 | D7 | D8 | D9 | D10 | D11 | D12 | D13 | GND | AREF | SDA | SCL | BUZZER | PTB18 | PTC8 | PTC9 | PTC0 | PTC7 | PTC5 | PTE26 | A5 | A4 | A3 | A2 | A1 | A0 | VIN | GND | GND | 5V | 3V3 | RST | 3V3 | NC
bPlace: THIS SIDE FACES DOWN!! | THIS SIDE FACES DOWN!! | 1 | 1 | 3 | 3 | 2 | 2 | :) | THIS SIDE FACES DOWN!! | THIS SIDE FACES DOWN!! | THIS SIDE FACES DOWN!!
tNames: LINE SENSOR MODULE v1.0
bNames: 3.3V | 5V | by Jakub Pánek | Steppy Mk2 v1.0 | Licensed under MIT license | https://github.com/jakubpanek/SteppyMk2